# EAGLE board mcs_expansion (EAGLE 5.11)
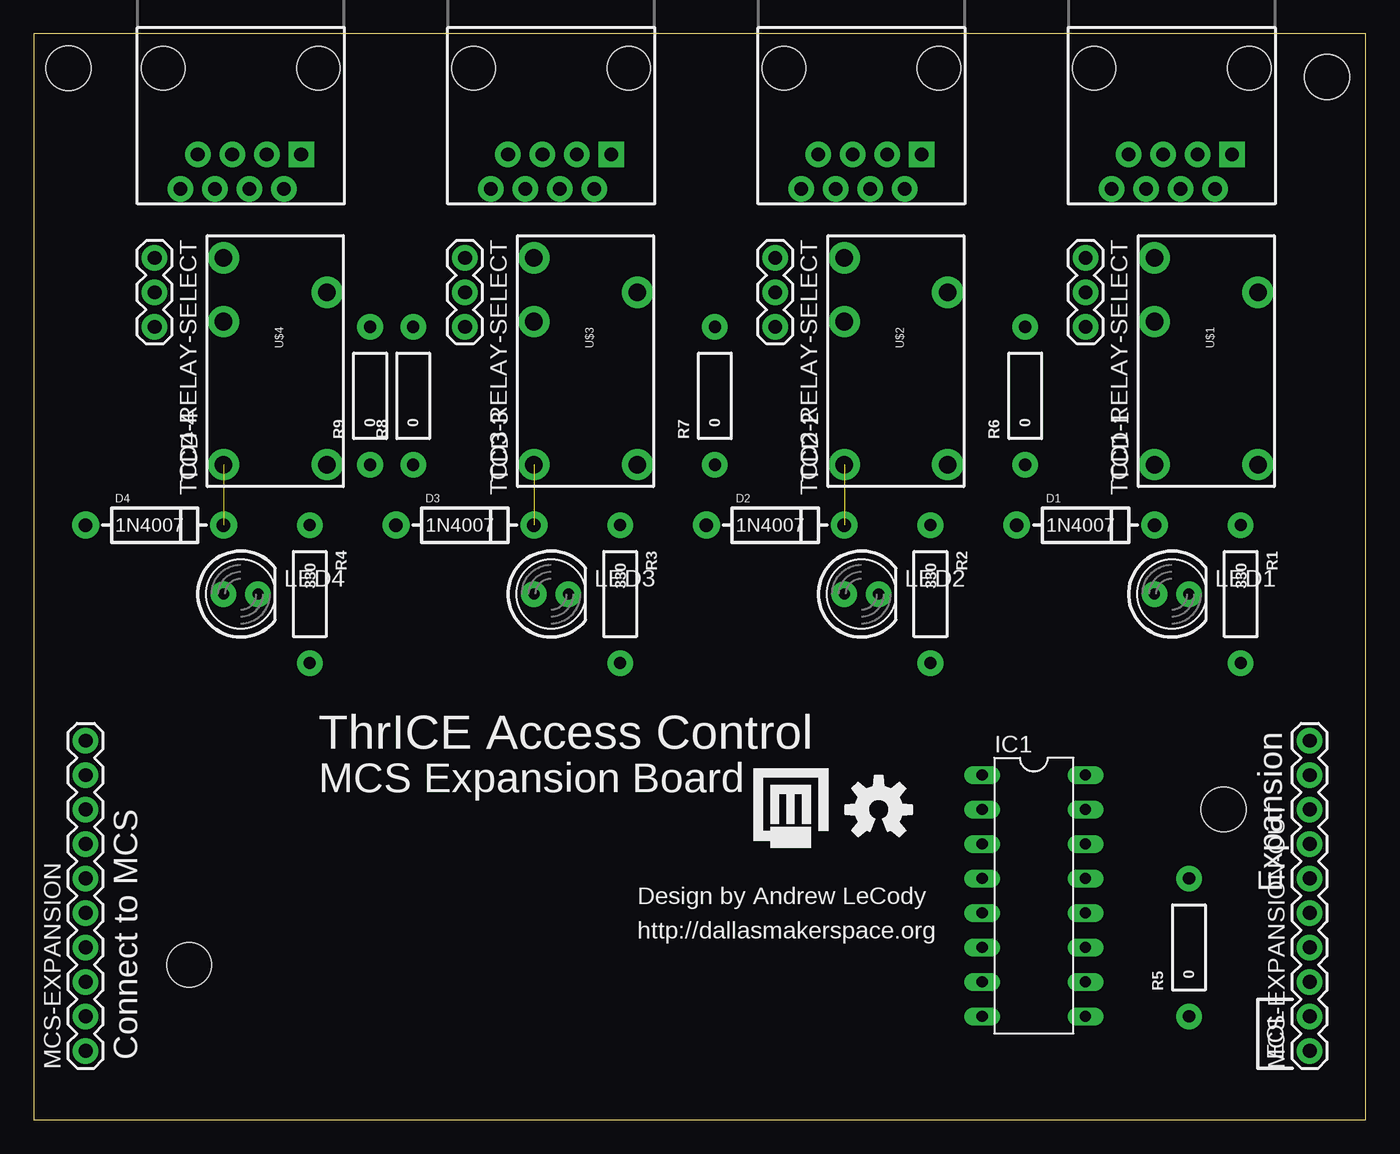
[diagram p0: board, top side]
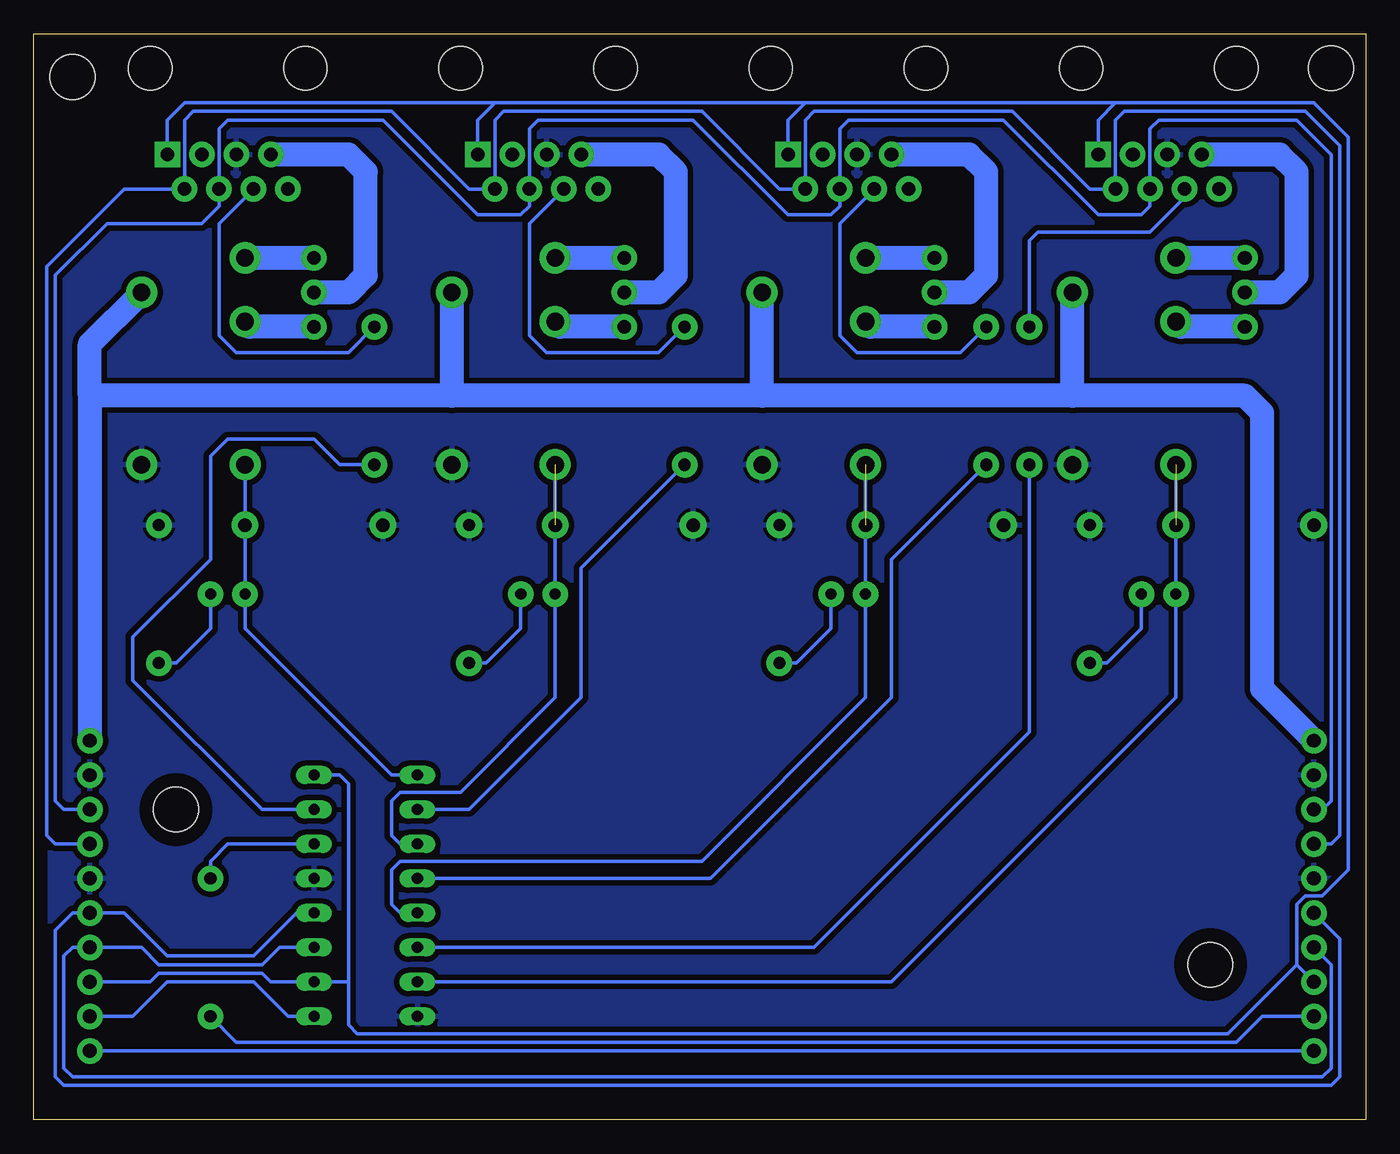
[diagram p1: board, bottom side, seen from below]

Size 98.09 x 80 mm. Coordinates in mm from the lower left corner, seen from the top.
Outline: 0,0 98.09,0 98.09,80 0,80 0,0
Copper layers (1*16): Top 0.035mm / dielectric 1.5mm / Bottom 0.035mm
Design rules "default": minimum track width 10mil, minimum drill 24mil, track to track 8mil, track to pad 8mil, pad to pad 8mil, via to via 8mil, smd to smd 8mil, copper to edge 40mil, drill to drill 8mil, minimum pad ring 10mil, minimum via ring 8mil, stop-mask expansion 4mil, vias tented up to drill 0mil, thermal gap 10mil
Net classes: 2 signal: width 0.406 mm, clearance 0.305 mm

## Footprints (pad centres in the part's own frame; a part is rotated, then mirrored left to right if it is on the bottom)
DIODE-1N4001 = drill 1 pad 1.981 round: A -5.08,0; C 5.08,0
DIL16 = drill 0.813 long: 1 -8.89,-3.81; 2 -6.35,-3.81; 3 -3.81,-3.81; 4 -1.27,-3.81; 5 1.27,-3.81; 6 3.81,-3.81; 7 6.35,-3.81; 8 8.89,-3.81; 9 8.89,3.81; 10 6.35,3.81; 11 3.81,3.81; 12 1.27,3.81; 13 -1.27,3.81; 14 -3.81,3.81; 15 -6.35,3.81; 16 -8.89,3.81
LED5MM = drill 0.813 pad 1.88 round: A -1.27,0; K 1.27,0
1X10 = drill 1.016 pad 1.88 round: 1 0,0; 2 2.54,0; 3 5.08,0; 4 7.62,0; 5 10.16,0; 6 12.7,0; 7 15.24,0; 8 17.78,0; 9 20.32,0; 10 22.86,0
AXIAL-0.4 = drill 0.9 pad 1.88 round: P$1 -5.08,0; P$2 5.08,0
RJ45-8 = drill 1 pad 1.88 square: 1 -4.445,6.35 | drill 1 pad 1.88 round: 2 -3.175,8.89; 3 -1.905,6.35; 4 -0.635,8.89; 5 0.635,6.35; 6 1.905,8.89; 7 3.175,6.35; 8 4.445,8.89 | hole 3.2: -5.715,0; 5.715,0
1X03 = drill 1.016 pad 1.88 round: 1 0,0; 2 2.54,0; 3 5.08,0
RELAY-JZC = drill 1.3 pad 2.286 round: 1 3.81,-8.89; 2 -3.81,1.651; 3 -3.81,6.35; 4 3.81,3.81; 5 -3.81,-8.89
STAND-OFF = hole 3.302: 0,0

## Placement (x,y rotation side)
D1  1N4007  [DIODE-1N4001]  77.47,43.81 0 top
D2  1N4007  [DIODE-1N4001]  54.61,43.81 0 top
D3  1N4007  [DIODE-1N4001]  31.75,43.81 0 top
D4  1N4007  [DIODE-1N4001]  8.89,43.81 0 top
IC1  74HC595N  [DIL16]  73.66,16.51 270 top
LED1  [LED5MM]  83.82,38.73 0 top
LED2  [LED5MM]  60.96,38.73 0 top
LED3  [LED5MM]  38.1,38.73 0 top
LED4  [LED5MM]  15.24,38.73 0 top
MCS-EXPANSION  M10"  [1X10]  3.81,5.08 90 top
MCS-EXPANSION-OUT  M10"  [1X10]  93.98,5.08 90 top
R1  330  [AXIAL-0.4]  88.9,38.73 270 top
R2  330  [AXIAL-0.4]  66.04,38.73 270 top
R3  330  [AXIAL-0.4]  43.18,38.73 270 top
R4  330  [AXIAL-0.4]  20.32,38.73 270 top
R5  0  [AXIAL-0.4]  85.09,12.7 90 top
R6  0  [AXIAL-0.4]  73.03,53.34 90 top
R7  0  [AXIAL-0.4]  50.16,53.34 90 top
R8  0  [AXIAL-0.4]  27.94,53.34 90 top
R9  0  [AXIAL-0.4]  24.77,53.34 90 top
TCD1  RJ45-8PTH  [RJ45-8]  83.82,77.47 180 top
TCD1-RELAY-SELECT  [1X03]  77.47,63.5 270 top
TCD2  RJ45-8PTH  [RJ45-8]  60.96,77.47 180 top
TCD2-RELAY-SELECT  [1X03]  54.61,63.5 270 top
TCD3  RJ45-8PTH  [RJ45-8]  38.1,77.47 180 top
TCD3-RELAY-SELECT  [1X03]  31.75,63.5 270 top
TCD4  RJ45-8PTH  [RJ45-8]  15.24,77.47 180 top
TCD4-RELAY-SELECT  [1X03]  8.89,63.5 270 top
U$1  RELAYPTH4  [RELAY-JZC]  86.36,57.15 0 top
U$2  RELAYPTH4  [RELAY-JZC]  63.5,57.15 0 top
U$3  RELAYPTH4  [RELAY-JZC]  40.64,57.15 0 top
U$4  RELAYPTH4  [RELAY-JZC]  17.78,57.15 0 top
U$5  [STAND-OFF]  2.54,77.47 0 top
U$6  [STAND-OFF]  95.25,76.83 0 top
U$7  [STAND-OFF]  87.63,22.86 0 top
U$8  [STAND-OFF]  11.43,11.43 0 top
U$9  [DMS-LOGO]  52.7,19.68 0 top
U$10  [OSHW-LOGO-M]  62.23,22.86 0 top

## Library data of the parts
D1-D4 LED1-LED4 MCS-EXPANSION MCS-EXPANSION-OUT R1-R9 TCD1 TCD1-RELAY-SELECT TCD2 TCD2-RELAY-SELECT TCD3 TCD3-RELAY-SELECT TCD4 TCD4-RELAY-SELECT U$1-U$8 U$10 = SparkFun
IC1 = 74xx-us
U$9 = DMS

## Nets
+12V [signal]: MCS-EXPANSION-OUT.10 MCS-EXPANSION.10 U$1.4 U$2.4 U$3.4 U$4.4
GND: D1.A D2.A D3.A D4.A IC1.8 IC1.13 MCS-EXPANSION-OUT.6 MCS-EXPANSION-OUT.9 MCS-EXPANSION.6 MCS-EXPANSION.9 R1.P$1 R2.P$1 R3.P$1 R4.P$1 TCD1.5 TCD2.5 TCD3.5 TCD4.5 U$1.1 U$2.1 U$3.1 U$4.1
MCS-RX: MCS-EXPANSION-OUT.8 MCS-EXPANSION.8 TCD1.4 TCD2.4 TCD3.4 TCD4.4
MCS-TX: MCS-EXPANSION-OUT.7 MCS-EXPANSION.7 TCD1.2 TCD2.2 TCD3.2 TCD4.2
N$1: LED1.K R1.P$2
N$2: LED2.K R2.P$2
N$3: LED3.K R3.P$2
N$4: LED4.K R4.P$2
N$5: MCS-EXPANSION.2 R5.P$1
N$6: IC1.15 R6.P$1
N$7: IC1.2 R7.P$1
N$8: IC1.4 R8.P$1
N$9: IC1.6 R9.P$1
SHIFT-CLOCK: IC1.11 MCS-EXPANSION-OUT.4 MCS-EXPANSION.4
SHIFT-INPUT: MCS-EXPANSION-OUT.1 MCS-EXPANSION.1
SHIFT-LATCH: IC1.12 MCS-EXPANSION-OUT.5 MCS-EXPANSION.5
SHIFT-OUTPUT-I: IC1.14 R5.P$2
SHIFT-OUTPUT-O: IC1.9 MCS-EXPANSION-OUT.2
TCD1-12V-STRIKE: TCD1-RELAY-SELECT.2 TCD1.7
TCD1-RELAY: D1.C IC1.1 LED1.A U$1.5
TCD1-RELAY-NC: TCD1-RELAY-SELECT.3 U$1.2
TCD1-RELAY-NO: TCD1-RELAY-SELECT.1 U$1.3
TCD1-SELECT: R6.P$2 TCD1.6
TCD2-12V-STRIKE: TCD2-RELAY-SELECT.2 TCD2.7
TCD2-RELAY: D2.C IC1.3 LED2.A U$2.5
TCD2-RELAY-NC: TCD2-RELAY-SELECT.3 U$2.2
TCD2-RELAY-NO: TCD2-RELAY-SELECT.1 U$2.3
TCD2-SELECT: R7.P$2 TCD2.6
TCD3-12V-STRIKE: TCD3-RELAY-SELECT.2 TCD3.7
TCD3-RELAY: D3.C IC1.5 LED3.A U$3.5
TCD3-RELAY-NC: TCD3-RELAY-SELECT.3 U$3.2
TCD3-RELAY-NO: TCD3-RELAY-SELECT.1 U$3.3
TCD3-SELECT: R8.P$2 TCD3.6
TCD4-12V-STRIKE: TCD4-RELAY-SELECT.2 TCD4.7
TCD4-RELAY: D4.C IC1.7 LED4.A U$4.5
TCD4-RELAY-NC: TCD4-RELAY-SELECT.3 U$4.2
TCD4-RELAY-NO: TCD4-RELAY-SELECT.1 U$4.3
TCD4-SELECT: R9.P$2 TCD4.6
VCC: IC1.10 IC1.16 MCS-EXPANSION-OUT.3 MCS-EXPANSION.3 TCD1.1 TCD2.1 TCD3.1 TCD4.1

## Tracks (layer width: path | path; a pad name or v marks a point on that pad's centre or on a via)
+12V
  Bottom 1.778: 93.98,53.34 93.98,57.15 U$1.4 | MCS-EXPANSION.10 7.62,31.75 7.62,52.07 8.89,53.34 21.59,53.34 | 21.59,53.34 44.45,53.34 | 44.45,53.34 67.31,53.34 | 67.31,53.34 93.98,53.34 | 21.59,53.34 U$4.4 | 44.45,53.34 U$3.4 | 67.31,53.34 U$2.4 | 93.98,53.34 MCS-EXPANSION-OUT.10
GND
  pour Bottom (isolate 0.406): 0,0 0,80.01 98.42,80.01 98.42,0
MCS-RX
  Bottom 0.254: MCS-EXPANSION.8 3.17,22.86 2.54,23.5 2.54,71.12 5.08,73.66 15.24,73.66 15.88,73.03 TCD4.4 15.88,67.31 16.51,66.67 19.68,66.67 26.67,73.66 38.1,73.66 38.73,73.03 TCD3.4 38.73,67.31 39.37,66.67 42.55,66.67 49.53,73.66 60.96,73.66 61.59,73.03 TCD2.4 61.59,67.31 62.23,66.67 65.41,66.67 72.39,73.66 83.82,73.66 84.45,73.03 TCD1.4 84.45,67.31 85.72,66.04 92.71,66.04 96.52,62.23 96.52,23.5 95.89,22.86 MCS-EXPANSION-OUT.8
MCS-TX
  Bottom 0.254: MCS-EXPANSION.7 2.54,20.32 1.91,20.95 1.91,71.75 4.45,74.3 17.78,74.3 18.41,73.66 TCD4.2 20.32,68.58 26.04,74.3 40.64,74.3 41.27,73.66 TCD3.2 43.18,68.58 48.9,74.3 63.5,74.3 64.14,73.66 TCD2.2 66.04,68.58 71.75,74.3 86.36,74.3 87,73.66 TCD1.2 91.44,68.58 97.16,62.87 97.16,20.95 96.52,20.32 MCS-EXPANSION-OUT.7
N$1
  Bottom 0.254: R1.P$2 87.63,33.66 85.09,36.2 LED1.K
N$2
  Bottom 0.254: LED2.K 62.23,36.2 64.77,33.66 R2.P$2
N$3
  Bottom 0.254: LED3.K 39.37,36.2 41.91,33.66 R3.P$2
N$4
  Bottom 0.254: LED4.K 16.51,36.2 19.05,33.66 R4.P$2
N$5
  Bottom 0.254: R5.P$1 83.19,5.71 9.53,5.71 7.62,7.62 MCS-EXPANSION.2
N$6
  Bottom 0.254: R6.P$1 75.56,48.26 77.47,50.16 83.82,50.16 85.09,48.9 85.09,41.27 90.81,35.56 90.81,32.38 81.28,22.86 IC1.15
N$7
  Bottom 0.254: IC1.2 66.04,22.86 57.78,31.11 57.78,40.64 R7.P$1
N$8
  Bottom 0.254: IC1.4 48.26,17.78 34.92,31.11 34.92,41.27 R8.P$1
N$9
  Bottom 0.254: R9.P$1 24.77,28.57 40.64,12.7 IC1.6
SHIFT-CLOCK
  Bottom 0.254: MCS-EXPANSION.4 2.54,11.43 2.54,3.81 3.17,3.17 95.25,3.17 95.89,3.81 95.89,12.06 95.25,12.7 MCS-EXPANSION-OUT.4 90.17,12.7 88.9,11.43 81.28,11.43 80.01,12.7 IC1.11
SHIFT-INPUT
  Bottom 0.254: MCS-EXPANSION.1 MCS-EXPANSION-OUT.1
SHIFT-LATCH
  Bottom 0.254: MCS-EXPANSION.5 1.91,13.34 1.91,3.17 2.54,2.54 95.89,2.54 96.52,3.17 96.52,13.97 95.25,15.24 MCS-EXPANSION-OUT.5 91.44,15.24 88.27,12.06 81.92,12.06 78.74,15.24 IC1.12
SHIFT-OUTPUT-I
  Bottom 0.254: R5.P$2 85.09,19.05 83.82,20.32 IC1.14
SHIFT-OUTPUT-O
  Bottom 0.254: MCS-EXPANSION-OUT.2 90.81,7.62 88.27,10.16 81.92,10.16 79.38,7.62 IC1.9
TCD1-12V-STRIKE
  Bottom 1.778: TCD1-RELAY-SELECT.2 74.93,60.96 73.66,62.23 73.66,69.85 74.93,71.12 TCD1.7
TCD1-RELAY
  Bottom 0.254: IC1.1 71.75,25.4 82.55,36.2 LED1.A D1.C U$1.5
TCD1-RELAY-NC
  Bottom 1.778: TCD1-RELAY-SELECT.3 82.17,58.42 U$1.2
TCD1-RELAY-NO
  Bottom 1.778: TCD1-RELAY-SELECT.1 U$1.3
TCD1-SELECT
  Bottom 0.254: TCD1.6 84.45,66.04 84.45,57.78 83.19,56.52 74.93,56.52 R6.P$2
TCD2-12V-STRIKE
  Bottom 1.778: TCD2-RELAY-SELECT.2 52.07,60.96 50.8,62.23 50.8,69.85 52.07,71.12 TCD2.7
TCD2-RELAY  (1 unrouted)
  Bottom 0.254: U$2.5 LED2.A 59.69,31.11 66.67,24.13 71.12,24.13 71.75,23.5 71.75,20.95 71.12,20.32 IC1.3
TCD2-RELAY-NC
  Bottom 1.778: TCD2-RELAY-SELECT.3 59.31,58.42 U$2.2
TCD2-RELAY-NO
  Bottom 1.778: TCD2-RELAY-SELECT.1 U$2.3
TCD2-SELECT
  Bottom 0.254: TCD2.6 61.59,66.04 61.59,57.78 60.33,56.52 52.07,56.52 R7.P$2
TCD3-12V-STRIKE
  Bottom 1.778: TCD3-RELAY-SELECT.2 29.21,60.96 27.94,62.23 27.94,69.85 29.21,71.12 TCD3.7
TCD3-RELAY  (1 unrouted)
  Bottom 0.254: U$3.5 LED3.A 36.83,31.11 48.9,19.05 71.12,19.05 71.75,18.41 71.75,15.88 71.12,15.24 IC1.5
TCD3-RELAY-NC
  Bottom 1.778: TCD3-RELAY-SELECT.3 36.45,58.42 U$3.2
TCD3-RELAY-NO
  Bottom 1.778: TCD3-RELAY-SELECT.1 U$3.3
TCD3-SELECT
  Bottom 0.254: TCD3.6 38.73,66.04 38.73,57.78 37.47,56.52 29.84,56.52 R8.P$2
TCD4-12V-STRIKE
  Bottom 1.778: TCD4-RELAY-SELECT.2 6.35,60.96 5.08,62.23 5.08,69.85 6.35,71.12 TCD4.7
TCD4-RELAY  (1 unrouted)
  Bottom 0.254: U$4.5 LED4.A 13.97,31.11 34.92,10.16 IC1.7
TCD4-RELAY-NC
  Bottom 1.778: TCD4-RELAY-SELECT.3 13.59,58.42 U$4.2
TCD4-RELAY-NO
  Bottom 1.778: TCD4-RELAY-SELECT.1 U$4.3
TCD4-SELECT
  Bottom 0.254: TCD4.6 13.34,67.94 15.88,65.41 24.13,65.41 24.77,64.77 R9.P$2
VCC
  Bottom 0.254: MCS-EXPANSION-OUT.3 89.53,10.16 88.9,10.79 81.28,10.79 80.64,10.16 IC1.10 74.93,10.16 | MCS-EXPANSION.3 5.08,11.43 | 5.08,11.43 5.08,15.88 4.45,16.51 3.17,16.51 1.27,18.41 1.27,72.39 3.81,74.93 18.41,74.93 | TCD4.1 19.68,73.66 18.41,74.93 | TCD1.1 88.27,73.66 87,74.93 64.14,74.93 | 18.41,74.93 41.27,74.93 | 41.27,74.93 64.14,74.93 | TCD2.1 65.41,73.66 64.14,74.93 | TCD3.1 42.55,73.66 41.27,74.93 | IC1.16 75.56,25.4 74.93,24.77 74.93,10.16 | 74.93,10.16 74.93,6.99 74.3,6.35 10.16,6.35 5.08,11.43

## Text on the board
tPlace: TCD 4 | TCD 3 | TCD 2 | TCD 1 | Expansion | ThrICE Access Control | MCS Expansion Board | Design by Andrew LeCody | http://dallasmakerspace.org | Connect to MCS | EOL
200bmp: /home/aceat64/Downloads/DMS_Logo_Black.bmp